# Altium PCB USB-C-SMD_MC-311D_2025-02-05.pcbdoc
Units mm, origin at the board's own origin, x right, y up, seen from the top; angles counter-clockwise.
Board outline 37.9 x 33.81 mm, 2 copper layers (Top Layer, Bottom Layer); 1 components, 0 nets, 18 pads, 0 vias.
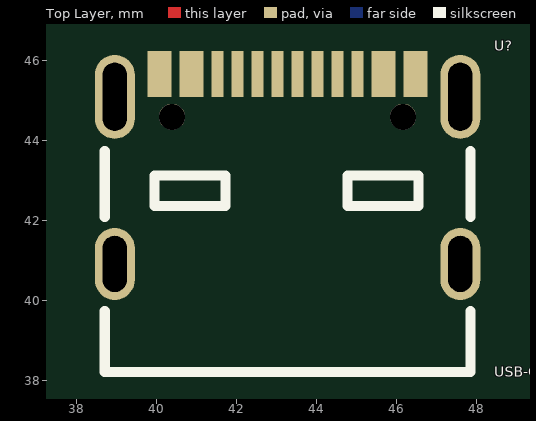
[diagram p0: Top Layer view]
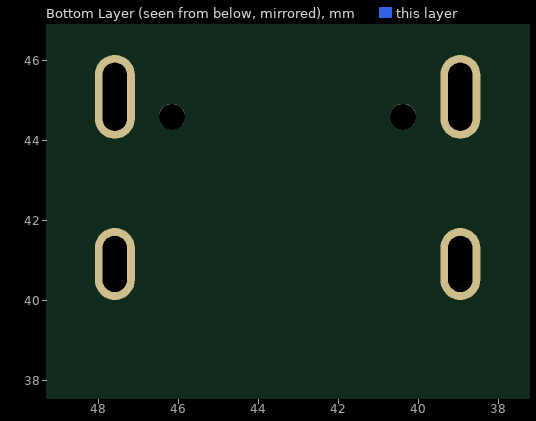
[diagram p1: Bottom Layer view, seen from below]

## Layer stack, top to bottom
Top Layer: signal copper (thickness not stored)
Dielectric: dielectric 0.32, FR-4, Dk 4.8
Bottom Layer: signal copper (thickness not stored)

## Board outline
63.299,25.4 25.4,25.4 25.4,59.208 63.299,59.208

## Components (designator, comment, footprint, x,y, rotation, side; value= is the part's Value field where it differs from the comment)
U? "USB-C-SMD_MC-311D" USB-C-SMD_MC-311D 43.27,42.177 r0 top

## Footprints (in the part's own frame and the unit in brackets; to place one, negate y for a bottom-side part, rotate by r counter-clockwise, add the part's x,y. Pads: shape width x height; smd on the part's side, far side on the other; paste and mask are expansions set on the pad)
USB-C-SMD_MC-311D [mm]
  oval 1x2.1 hole 0.6 slot 1.7 at 90 deg paste+0 mask+0.05: 1(-4.32,2.927) 4(4.32,2.927)
  oval 1x1.8 hole 0.6 slot 1.4 at 90 deg paste+0 mask+0.05: 2(-4.32,-1.253) 3(4.32,-1.253)
  rect 0.6x1.15 smd paste-100 mask+0.05: A1-B12(-3.2,3.502) A4-B9(-2.4,3.502) B1-A12(3.2,3.502) B4-A9(2.4,3.502)
  rect 0.3x1.15 smd paste-100 mask+0.05: A5(-1.25,3.502) A6(-0.25,3.502) A7(0.25,3.502) A8(1.25,3.502) B5(1.75,3.502) B6(0.75,3.502) B7(-0.75,3.502) B8(-1.75,3.502)
  round 0.65 hole 0.65 unplated paste+0: ""(-2.89,2.427) ""(2.89,2.427)
  silkscreen extent -4.57,-3.95 4.57,1.57

## Nets (pads, with @x,y where several pads share a name; then routed paths per layer and width w, separated by ;. In a path a pad name is that pad's centre, name@x,y a point inside that pad or via, vN(x,y) a via of type N, cw(c..) or ccw(c..) an arc to the next point about the centre after c; other vN are vias at no path point)
pads on no net: U?. U?.1 U?.2 U?.3 U?.4 U?.A1-B12 U?.A4-B9 U?.A5 U?.A6 U?.A7 U?.A8 U?.B1-A12 U?.B4-A9 U?.B5 U?.B6 U?.B7 U?.B8

## Silkscreen, mask and mechanical layers (free items; w line width, h text height)
Document:
  lines w0.003: 44.349,42.304 44.35,42.304